# EAGLE board mac-serial-interposer (EAGLE 6.5.0)
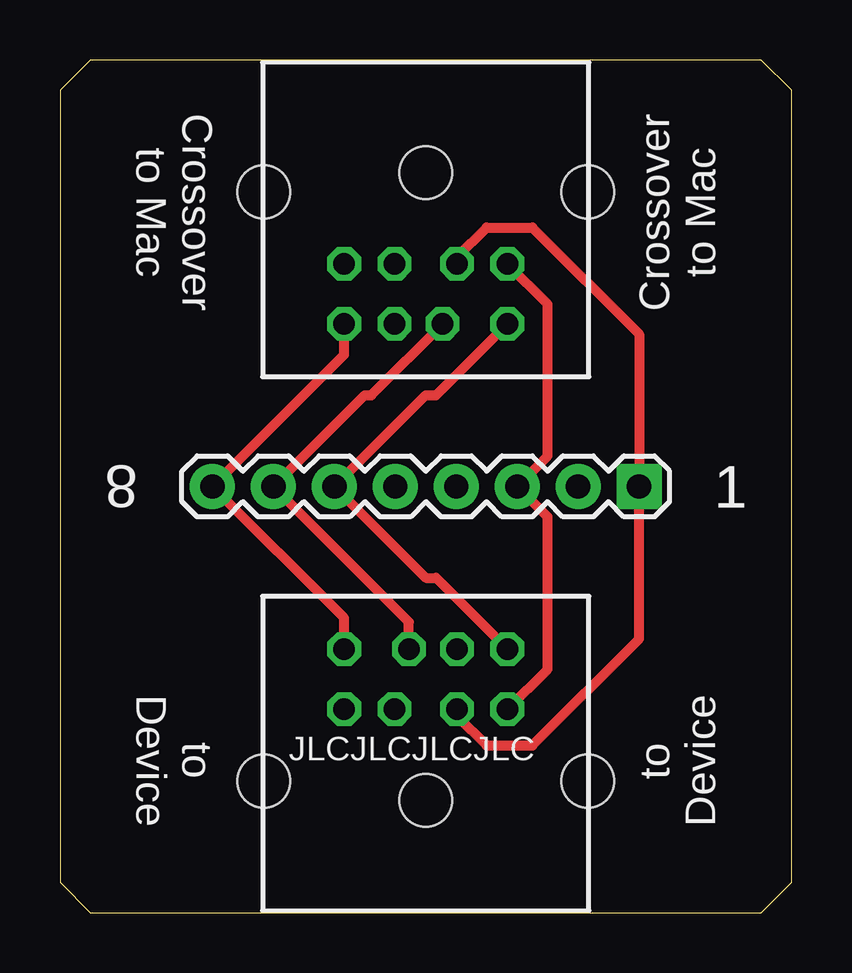
[diagram p0: board, top side]
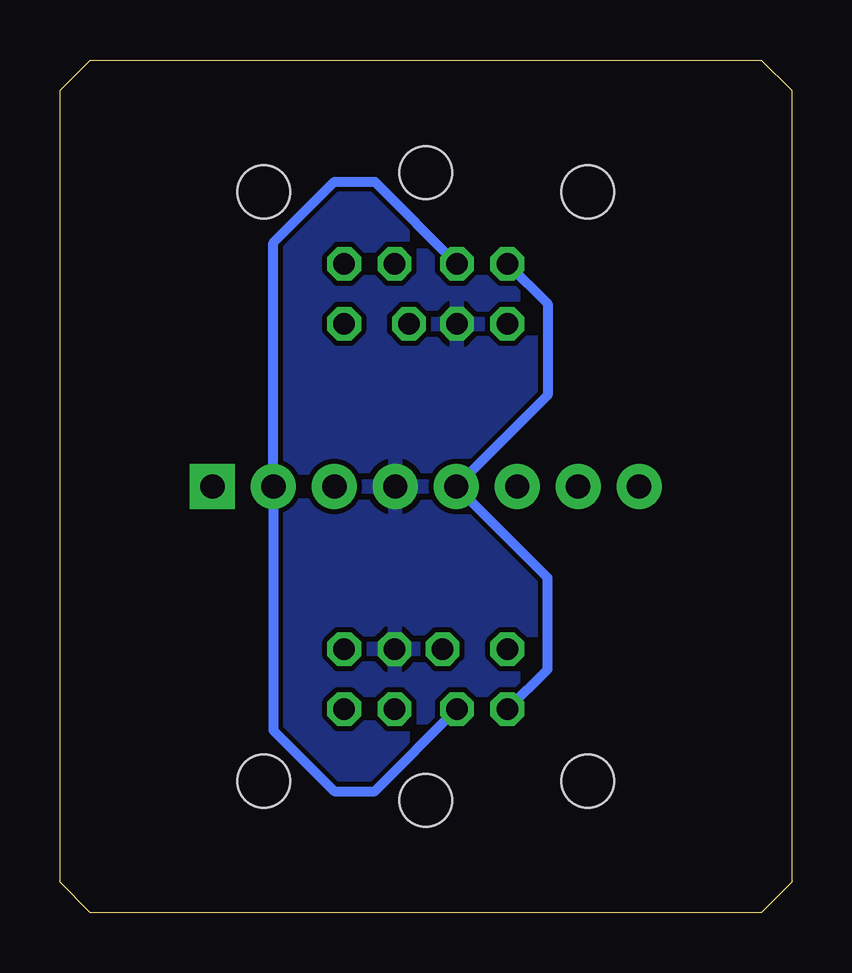
[diagram p1: board, bottom side, seen from below]

Size 30.48 x 35.56 mm. Coordinates in mm from the lower left corner, seen from the top.
Outline: 1.27,0 29.21,0 30.48,1.27 30.48,34.29 29.21,35.56 1.27,35.56 0,34.29 0,1.27 1.27,0
Copper layers (1*16): Top 0.035mm / dielectric 1.5mm / Bottom 0.035mm
Design rules "default": minimum track width 10mil, minimum drill 24mil, track to track 8mil, track to pad 8mil, pad to pad 8mil, via to via 8mil, smd to smd 8mil, copper to edge 40mil, drill to drill 8mil, minimum pad ring 10mil, minimum via ring 8mil, stop-mask expansion 4mil, vias tented up to drill 0mil, thermal gap 10mil

## Footprints (pad centres in the part's own frame; a part is rotated, then mirrored left to right if it is on the bottom)
SSV-BC08 = drill 0.9 octagon: 1 1.3,8.5; 2 -1.3,8.5; 3 3.4,8.5; 4 1.3,11; 5 -3.4,8.5; 6 3.4,11; 7 -0.7,11; 8 -3.4,11 | hole 2.2: -6.75,5.5; 0,4.7; 6.75,5.5
1X08 = drill 1.016 pad 1.88 square: 1 0,0 | drill 1.016 pad 1.88: 2 2.54,0; 3 5.08,0; 4 7.62,0; 5 10.16,0; 6 12.7,0; 7 15.24,0; 8 17.78,0

## Placement (x,y rotation side)
E$1  [SSV-BC08]  15.24,35.56 180 top
E$2  [SSV-BC08]  15.24,0 0 top
E$3  [1X08]  24.13,17.78 180 top

## Library data of the parts
E$1 E$2 = con-yamaichi
E$3 = SparkFun-Connectors

## Nets
GND: E$1.4 E$2.4 E$3.4
S$1: E$1.6 E$2.8 E$3.8
S$2: E$1.7 E$2.7 E$3.7
S$3: E$1.8 E$2.6 E$3.6
S$5: E$1.3 E$2.5 E$3.5
S$6: E$1.1 E$2.2 E$3.2
S$7: E$1.2 E$2.1 E$3.1
S$8: E$1.5 E$2.3 E$3.3

## Tracks (layer width: path | path; a pad name or v marks a point on that pad's centre or on a via)
GND
  pour Bottom: 1.27,33.02 2.54,34.29 27.94,34.29 29.21,33.02 29.21,2.54 27.94,1.27 2.54,1.27 1.27,2.54
S$1
  Top 0.406: E$2.8 11.84,12.29 E$3.8 11.84,23.27 E$1.6
S$2
  Top 0.406: E$2.7 14.54,12.13 E$3.7 12.7,21.59 12.97,21.59 E$1.7
S$3
  Top 0.406: E$1.8 15.67,21.59 15.24,21.59 E$3.6 15.24,13.97 15.67,13.97 E$2.6
S$5
  Bottom 0.406: E$1.3 11.82,27.06 10.16,25.4 10.16,21.59 E$3.5 10.16,13.97 10.16,10.16 11.82,8.5 E$2.5
S$6
  Bottom 0.406: E$1.1 17.36,30.48 19.05,30.48 21.59,27.94 E$3.2 21.59,7.62 19.05,5.08 17.36,5.08 E$2.2
S$7
  Top 0.406: E$1.2 16.54,27.34 17.78,28.57 19.68,28.57 24.13,24.13 E$3.1 24.13,11.43 19.68,6.99 17.78,6.99 16.54,8.22 E$2.1
S$8
  Top 0.406: E$2.3 18.66,8.5 20.32,10.16 20.32,16.51 E$3.3 20.32,19.05 20.32,25.38 E$1.5

## Text on the board
tNames: Crossover / to Mac | Crossover / to Mac | 8 | 1 | to / Device | JLCJLCJLCJLC | to / Device